# Altium PCB PCB2.PcbDoc
Units mm, origin at the board's own origin, x right, y up, seen from the top; angles counter-clockwise.
Board outline 90 x 105 mm, 2 copper layers (Top Layer, Bottom Layer); 9 components, 22 nets, 88 pads, 20 vias.
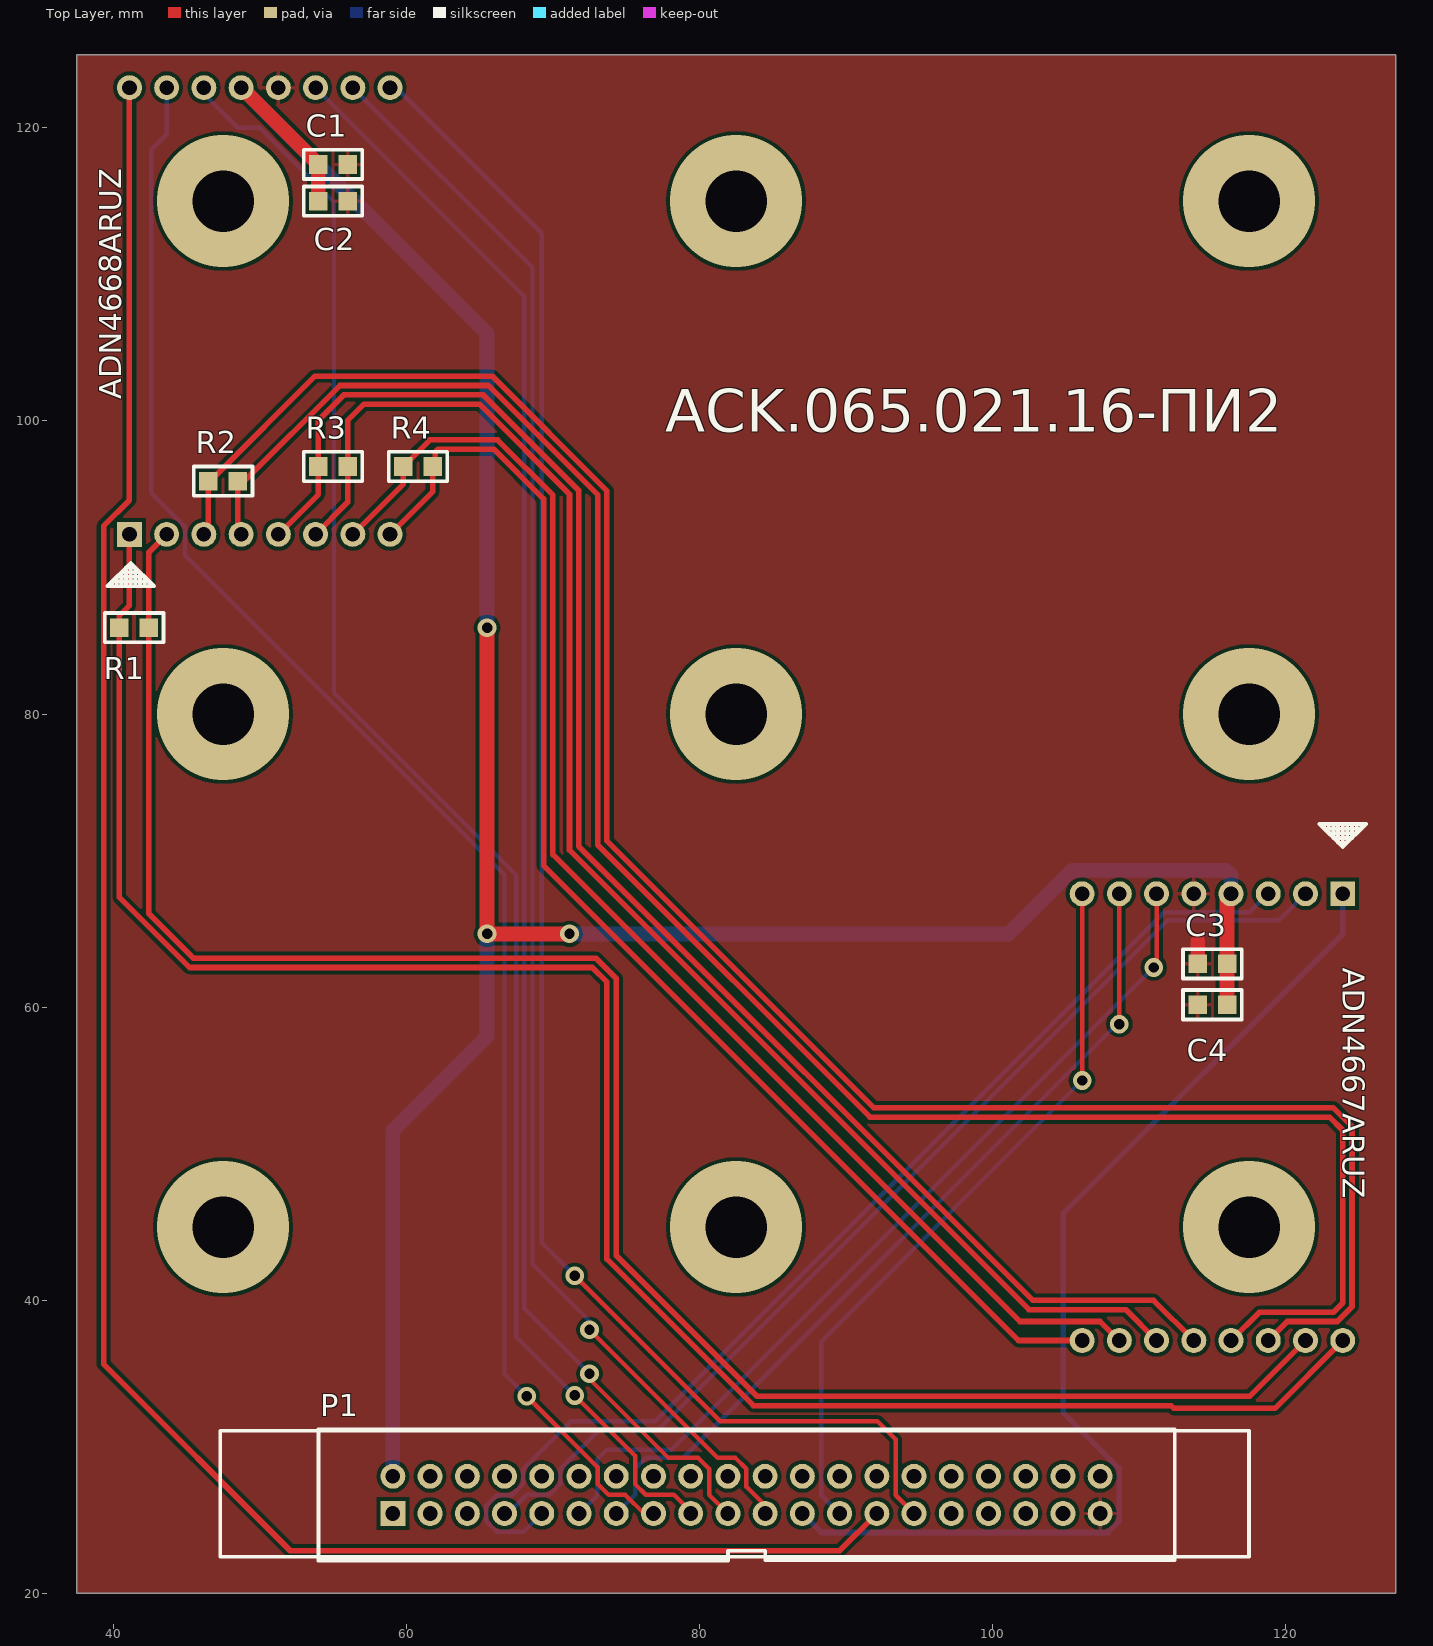
[diagram p0: Top Layer view]
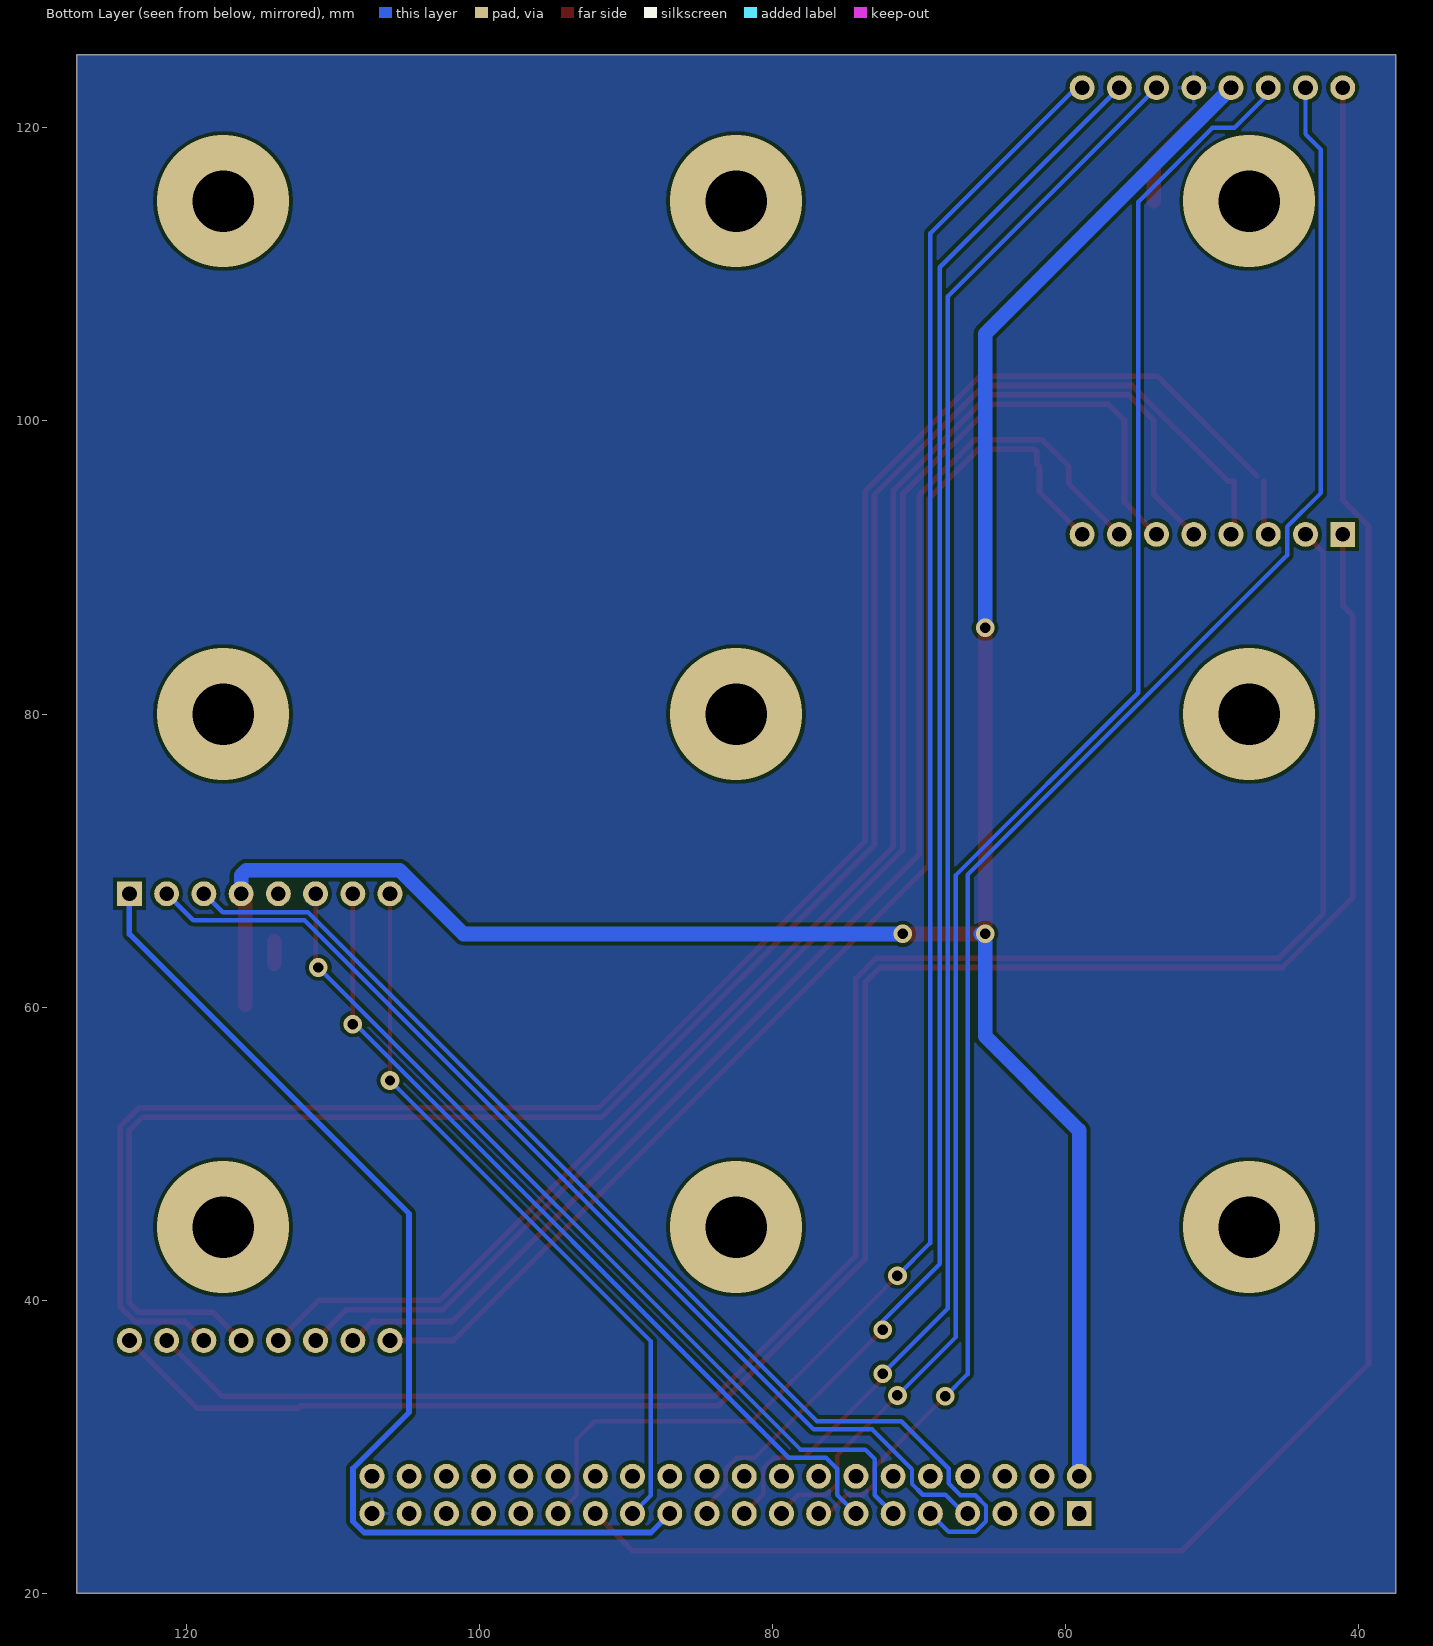
[diagram p1: Bottom Layer view, seen from below]

## Layer stack, top to bottom
Top Solder: solder mask 0.0102, Solder Resist, Dk 3.5
Top Layer: signal copper 0.0356
Dielectric 1: dielectric 0.32, FR-4, Dk 4.8
Bottom Layer: signal copper 0.0356
Bottom Solder: solder mask 0.0102, Solder Resist, Dk 3.5

## Board outline
37.5,20 37.5,125 127.5,125 127.5,20

## Design rules (kind name [scope] priority, off if disabled: settings)
Clearance [All] p1: gap=0.254
ComponentClearance [All] p1 off: gap=0.254 collisioncheckmode=3 verticalgap=0.254 showdistances=FALSE
DiffPairsRouting [All] p1: maxlimit=0.254 minlimit=0.254 mostfreqgap=0.254 toplayer_minwidth=0.381 toplayer_maxwidth=0.381 toplayer_prefwidth=0.381 bottomlayer_minwidth=0.381 bottomlayer_maxwidth=0.381 bottomlayer_prefwidth=0.381 maxuncoupledlength=12.7
HoleSize [All] p1: absolutevalues=TRUE maxlimit=5 minlimit=0.025 maxpercent=80.000 minpercent=20.000
PolygonConnect [All] p1: connectstyle=Relief reliefconductorwidth=0.254 reliefentries=4 polygonreliefangle="90 Angle" airgapwidth=0.254
RoutingVias [All] p1: holewidth=0.711 width=1.27 viastyle="Through Hole" minholewidth=0.711 minwidth=1.27 maxholewidth=0.711 maxwidth=1.27
SilkToSolderMaskClearance [IsPad] p1: minsilkscreentomaskgap=0.1 clearancetoexposedcopper=TRUE
SolderMaskExpansion [All] p1: expansion=0.102
Width Width_power [InNetClass('power')] p1: maxlimit=1 minlimit=1 preferedwidth=1
Width [All] p2: maxlimit=0.3 minlimit=0.3 preferedwidth=0.3
26 further rules are at their usual default settings.

## Classes and differential pairs
net class power: GND VCC
component class Sheet2: C1 C2 C3 C4 P1
differential pair NewDifferentialPair1: +EN7 -EN8
differential pair LVDS4: +LVDS4_P -LVDS4_N
differential pair LVDS3: +LVDS3_P -LVDS3_N
differential pair LVDS2: +LVDS2_P -LVDS2_N
differential pair LVDS1: +LVDS1_P -LVDS1_N

## Components (designator, comment, footprint, x,y, rotation, side; value= is the part's Value field where it differs from the comment)
C1 "1uF" C_0805 55,117.5 r0 top
C2 "0.1uF" C_0805 55,115 r0 top
C3 "1uF" C_0805 115,62.96 r180 top
C4 "0.1uF" C_0805 115,60.167 r180 top
P1 "IDC-40" IDC-40 83.213,26.725 r90 top
R1 "100 Om" R_0805 41.427,85.893 r180 top
R2 "100 Om" R_0805 47.5,95.89 r180 top
R3 "100 Om" R_0805 55,96.89 r180 top
R4 "100 Om" R_0805 60.795,96.89 r180 top

## Footprints (in the part's own frame and the unit in brackets; to place one, negate y for a bottom-side part, rotate by r counter-clockwise, add the part's x,y. Pads: shape width x height; smd on the part's side, far side on the other; paste and mask are expansions set on the pad)
C_0805 [mm]
  rect 1.27x1.27 smd: 1(-1,0) 2(1,0)
  silkscreen extent -2,-1 2,1
IDC-40 [mm]
  rect 1.7x1.7 hole 1: 1(-1.27,24.13)
  round 1.7 hole 1: 2(1.27,24.13) 3(-1.27,21.59) 4(1.27,21.59) 5(-1.27,19.05) 6(1.27,19.05) 7(-1.27,16.51) 8(1.27,16.51) 9(-1.27,13.97) 10(1.27,13.97) 11(-1.27,11.43) 12(1.27,11.43) 13(-1.27,8.89) 14(1.27,8.89) 15(-1.27,6.35) 16(1.27,6.35) 17(-1.27,3.81) 18(1.27,3.81) 19(-1.27,1.27) 20(1.27,1.27) 21(-1.27,-1.27) 22(1.27,-1.27) 23(-1.27,-3.81) 24(1.27,-3.81) 25(-1.27,-6.35) 26(1.27,-6.35) 27(-1.27,-8.89) 28(1.27,-8.89) 29(-1.27,-11.43) 30(1.27,-11.43) 31(-1.27,-13.97) 32(1.27,-13.97) 33(-1.27,-16.51) 34(1.27,-16.51) 35(-1.27,-19.05) 36(1.27,-19.05) 37(-1.27,-21.59) 38(1.27,-21.59) 39(-1.27,-24.13) 40(1.27,-24.13)
  silkscreen extent -4.47,-29.21 4.48,29.21
R_0805 [mm]
  rect 1.27x1.27 smd: 1(-1,0) 2(1,0)
  silkscreen extent -2,-1 2,1

## Part data
C1 C2 C3 C4: library part "capacitor 0805"
P1: "разъем 2529"
R1 R2 R3 R4: library part "resistor 0805"

## Free pads (board coordinates)
  rect 1.7x1.7 hole 1: 1(41.11,92.26) 1(123.89,67.74)
  round 1.7 hole 1: 2(43.65,92.26) 2(121.35,67.74) 3(46.19,92.26) 3(118.81,67.74) 4(48.73,92.26) 4(116.27,67.74) 5(51.27,92.26) 5(113.73,67.74) 6(53.81,92.26) 6(111.19,67.74) 7(56.35,92.26) 7(108.65,67.74) 8(58.89,92.26) 8(106.11,67.74) 9(58.89,122.74) 9(106.11,37.26) 10(56.35,122.74) 10(108.65,37.26) 11(53.81,122.74) 11(111.19,37.26) 12(51.27,122.74) 12(113.73,37.26) 13(48.73,122.74) 13(116.27,37.26) 14(46.19,122.74) 14(118.81,37.26) 15(43.65,122.74) 15(121.35,37.26) 16(41.11,122.74) 16(123.89,37.26)

## Via types
v1: diameter 1.27, hole 0.711, Top Layer to Bottom Layer, 11 vias
v2: diameter 9, hole 4.2, Top Layer to Bottom Layer, 9 vias

## Nets (pads, with @x,y where several pads share a name; then routed paths per layer and width w, separated by ;. In a path a pad name is that pad's centre, name@x,y a point inside that pad or via, vN(x,y) a via of type N, cw(c..) or ccw(c..) an arc to the next point about the centre after c; other vN are vias at no path point)
EN7: P1.23 pad.1@123.89,67.74 | length 74.8
  Bottom Layer w0.381: P1.23 88.317,24.161 107.879,24.161 108.637,24.919 108.637,28.531 104.816,32.353 104.816,45.913 123.89,64.987 pad.1@123.89,67.74
EN8: P1.27 pad.16@41.11,122.74 | length 146.9
  Top Layer w0.381: pad.16@41.11,122.74 41.11,94.589 39.348,92.827 39.348,35.652 52.085,22.915 89.563,22.915 P1.27
GND: C1.2 C2.2 C3.2 C4.2 P1.39 pad.5@113.73,67.74 pad.12@51.27,122.74 | length 1.5
  Top Layer w1: C3.2 114,64.5
IN1: P1.7 pad.2@121.35,67.74 | length 72.8
  Bottom Layer w0.3: P1.7 66.934,25.455 68.22,26.741 69.762,26.741 70.497,27.476 70.497,28.482 73.22,31.205 77.212,31.205 111.939,65.932 119.542,65.932 pad.2@121.35,67.74
IN2: P1.9 pad.3@118.81,67.74 | length 76.9
  Bottom Layer w0.3: P1.9 67.989,24.201 66.184,24.201 65.449,24.936 65.449,25.974 66.184,26.709 67.19,26.709 67.989,27.508 67.989,28.514 71.234,31.759 76.982,31.759 111.709,66.486 117.524,66.486 118.778,67.74 pad.3@118.81,67.74
IN3: P1.11 pad.6@111.19,67.74 | length 61.2
  Top Layer w0.3: v1(111,62.708) 111.19,62.898 pad.6@111.19,67.74
  Bottom Layer w0.3: P1.11 73.037,26.709 73.037,29.166 73.688,29.817 78.11,29.817 v1(111,62.708)
IN4: P1.13 pad.7@108.65,67.74 | length 58.1
  Top Layer w0.3: v1(108.65,58.85) pad.7@108.65,67.74
  Bottom Layer w0.3: P1.13 75.609,26.741 75.609,28.514 76.358,29.263 78.904,29.263 108.491,58.85 v1(108.65,58.85)
LVDS1_N: pad.1@41.11,92.26 pad.16@123.89,37.26 R1.2 | length 135.9
  Top Layer w0.381: pad.1@41.11,92.26 41.11,87.401 40.428,86.719 R1.2 40.428,67.494 45.214,62.708 72.688,62.708 73.688,61.708 73.688,42.807 83.68,32.815 112.185,32.815 112.371,32.629 119.259,32.629 pad.16@123.89,37.26
LVDS1_P: pad.2@43.65,92.26 pad.15@121.35,37.26 R1.1 | length 131.6
  Top Layer w0.381: pad.2@43.65,92.26 42.427,91.038 R1.1 42.427,66.392 45.477,63.343 72.951,63.343 74.323,61.971 74.323,43.07 83.943,33.45 117.54,33.45 pad.15@121.35,37.26
LVDS2_N: pad.4@48.73,92.26 pad.13@116.27,37.26 R2.1 | length 137.3
  Top Layer w0.381: pad.4@48.73,92.26 48.5,92.49 R2.1 48.944,95.89 55.474,102.42 65.603,102.42 73.053,94.97 73.053,71.081 91.634,52.5 122.992,52.5 123.89,51.602 123.89,39.825 123.255,39.19 118.2,39.19 pad.13@116.27,37.26
LVDS2_P: pad.3@46.19,92.26 pad.14@118.81,37.26 R2.2 | length 138.3
  Top Layer w0.381: pad.3@46.19,92.26 46.5,92.57 R2.2 ; R2.2@46.963,96.252 53.766,103.055 65.866,103.055 73.688,95.233 73.688,71.344 91.897,53.135 123.255,53.135 124.525,51.865 124.525,39.561 123.518,38.555 120.105,38.555 pad.14@118.81,37.26
LVDS3_N: pad.5@51.27,92.26 pad.12@113.73,37.26 R3.2 | length 110.3
  Top Layer w0.381: pad.5@51.27,92.26 54,94.99 R3.2 54,100.048 55.737,101.785 65.246,101.785 71.768,95.263 71.768,70.977 102.746,40 110.99,40 pad.12@113.73,37.26
LVDS3_P: pad.6@53.81,92.26 pad.11@111.19,37.26 R3.1 | length 105
  Top Layer w0.381: pad.6@53.81,92.26 56,94.45 R3.1 56,100.033 57.117,101.15 64.983,101.15 71.133,95 71.133,70.714 102.482,39.365 109.085,39.365 pad.11@111.19,37.26
LVDS4_N: pad.8@58.89,92.26 pad.9@106.11,37.26 R4.1 | length 91
  Top Layer w0.381: pad.8@58.89,92.26 61.795,95.165 R4.1 61.985,97.081 61.985,97.895 62.16,98.07 65.973,98.07 69.365,94.678 69.365,69.662 101.767,37.26 pad.9@106.11,37.26
LVDS4_P: pad.7@56.35,92.26 pad.10@108.65,37.26 R4.2 | length 95.5
  Top Layer w0.381: pad.7@56.35,92.26 59.795,95.705 R4.2 61.61,98.705 66.236,98.705 70,94.941 70,70.421 101.867,38.555 107.343,38.555 108.637,37.26 pad.10@108.65,37.26
NEN7: P1.25 pad.8@106.11,67.74 | length 50.2
  Top Layer w0.3: v1(106.11,55) pad.8@106.11,67.74
  Bottom Layer w0.3: P1.25 88.309,26.709 88.309,37.199 v1(106.11,55)
NEN8: P1.29 pad.9@58.89,122.74 | length 118.6
  Top Layer w0.3: v1(71.49,41.681) 81.412,31.759 92.142,31.759 93.389,30.513 93.389,26.709 P1.29
  Bottom Layer w0.3: pad.9@58.89,122.74 59.314,122.74 69.243,112.811 69.243,43.905 69.266,43.905 v1(71.49,41.681)
OUT1: P1.15 pad.15@43.65,122.74 | length 113
  Top Layer w0.3: v1(68.22,33.45) 73.069,28.601 73.069,27.476 73.804,26.741 74.929,26.741 76.215,25.455 P1.15
  Bottom Layer w0.3: pad.15@43.65,122.74 43.65,119.554 42.596,118.5 42.596,95.087 44.904,92.779 44.904,90.833 66.703,69.034 66.703,34.967 v1(68.22,33.45)
OUT2: P1.17 pad.14@46.19,122.74 | length 113
  Top Layer w0.3: v1(71.49,33.51) 75.609,29.391 75.609,27.476 76.344,26.741 78.259,26.741 79.403,25.597 P1.17
  Bottom Layer w0.3: pad.14@46.19,122.74 46.19,122.31 48.5,120 50,120 55.064,114.936 55.064,81.456 67.5,69.02 67.5,37.5 v1(71.49,33.51)
OUT3: P1.19 pad.11@53.81,122.74 | length 110.1
  Top Layer w0.3: v1(72.5,35) 72.5,34.638 77.889,29.249 79.922,29.249 80.657,28.514 80.657,26.741 P1.19
  Bottom Layer w0.3: pad.11@53.81,122.74 68.054,108.496 68.054,39.446 v1(72.5,35)
OUT4: P1.21 pad.10@56.35,122.74 | length 109.7
  Top Layer w0.3: v1(72.5,37.99) 81.241,29.249 82.462,29.249 83.197,28.514 83.197,27.293 84.483,26.007 P1.21
  Bottom Layer w0.3: pad.10@56.35,122.74 68.608,110.482 68.608,42.485 72.5,38.593 v1(72.5,37.99)
VCC: C1.1 C2.1 C3.1 C4.1 P1.2 pad.4@116.27,67.74 pad.13@48.73,122.74 | length 176.2
  Top Layer w1: pad.13@48.73,122.74 48.76,122.74 C1.1 C2.1 ; v1(65.509,85.893) v1(65.509,65) v1(71.133,65) ; C4.1 C3.1 116,67.47 pad.4@116.27,67.74
  Bottom Layer w1: pad.13@48.73,122.74 65.509,105.961 v1(65.509,85.893) ; P1.2 59.083,51.583 65.509,58.009 v1(65.509,65) v1@65.799,65 ; v1(71.133,65) 101.102,65 105.446,69.344 115.92,69.344 116.27,68.994 pad.4@116.27,67.74
pads on no net: P1.1 P1.3 P1.4 P1.5 P1.6 P1.8 P1.10 P1.12 P1.14 P1.16 P1.18 P1.20 P1.22 P1.24 P1.26 P1.28 P1.30 P1.31 P1.32 P1.33 P1.34 P1.35 P1.36 P1.37 P1.38 P1.40
copper on no net:
  other v2: 47.5,45 82.5,45 117.5,45 47.5,80 82.5,80 117.5,80 47.5,115 82.5,115 117.5,115

## Polygon pours and split planes (outlines as drawn)
GND on Top Layer "top layer gnd" (solid, pour order 8): 37.5,125 127.5,125 127.5,20 37.5,20
GND on Bottom Layer "bot layer gnd" (solid, pour order 10): 37.5,125 127.5,125 127.5,20 37.5,20

## Silkscreen, mask and mechanical layers (free items; w line width, h text height)
Top Overlay:
  lines w0.254: 39.928,88.73 39.928,89.048 42.468,89.048 42.468,88.73 ; 40.246,88.73 40.246,89.365 42.151,89.365 42.151,88.73 ; 40.563,88.73 40.563,89.683 41.833,89.683 41.833,88.73 ; 40.881,88.73 40.881,90 41.516,90 41.516,88.73 ; 41.198,88.73 41.198,90.318 ; 122.62,72.5 122.62,72.182 125.16,72.182 125.16,72.5 ; 122.938,72.5 122.938,71.865 124.843,71.865 124.843,72.5 ; 123.255,72.5 123.255,71.547 124.525,71.547 124.525,72.5 ; 123.573,72.5 123.573,71.23 124.208,71.23 124.208,72.5 ; 123.89,72.5 123.89,70.912 ; 41.198,90.318 42.786,88.73 39.611,88.73 41.198,90.318 ; 123.89,70.912 122.303,72.5 125.478,72.5 123.89,70.912 ; 47.3,22.5 117.5,22.5 117.5,31.1 47.3,31.1 47.3,22.5
  text "ADN4668ARUZ" at 40.563,101.468 h1.52 r90
  text "ACK.065.021.16-ПИ2" at 77.679,98.292 h5
  text "ADN4667ARUZ" at 123.89,62.708 h1.52 r270
Mechanical 1:
  the board outline again, w1